# Altium PCB RPCB6996130008R01.PcbDoc
Units mil, origin at the board's own origin, x right, y up, seen from the top; angles counter-clockwise.
Board outline 2975 x 2998.52 mil, 2 copper layers (Top Layer, Top, Bottom Layer, Bottom); 65 components, 50 nets, 211 pads, 86 vias.
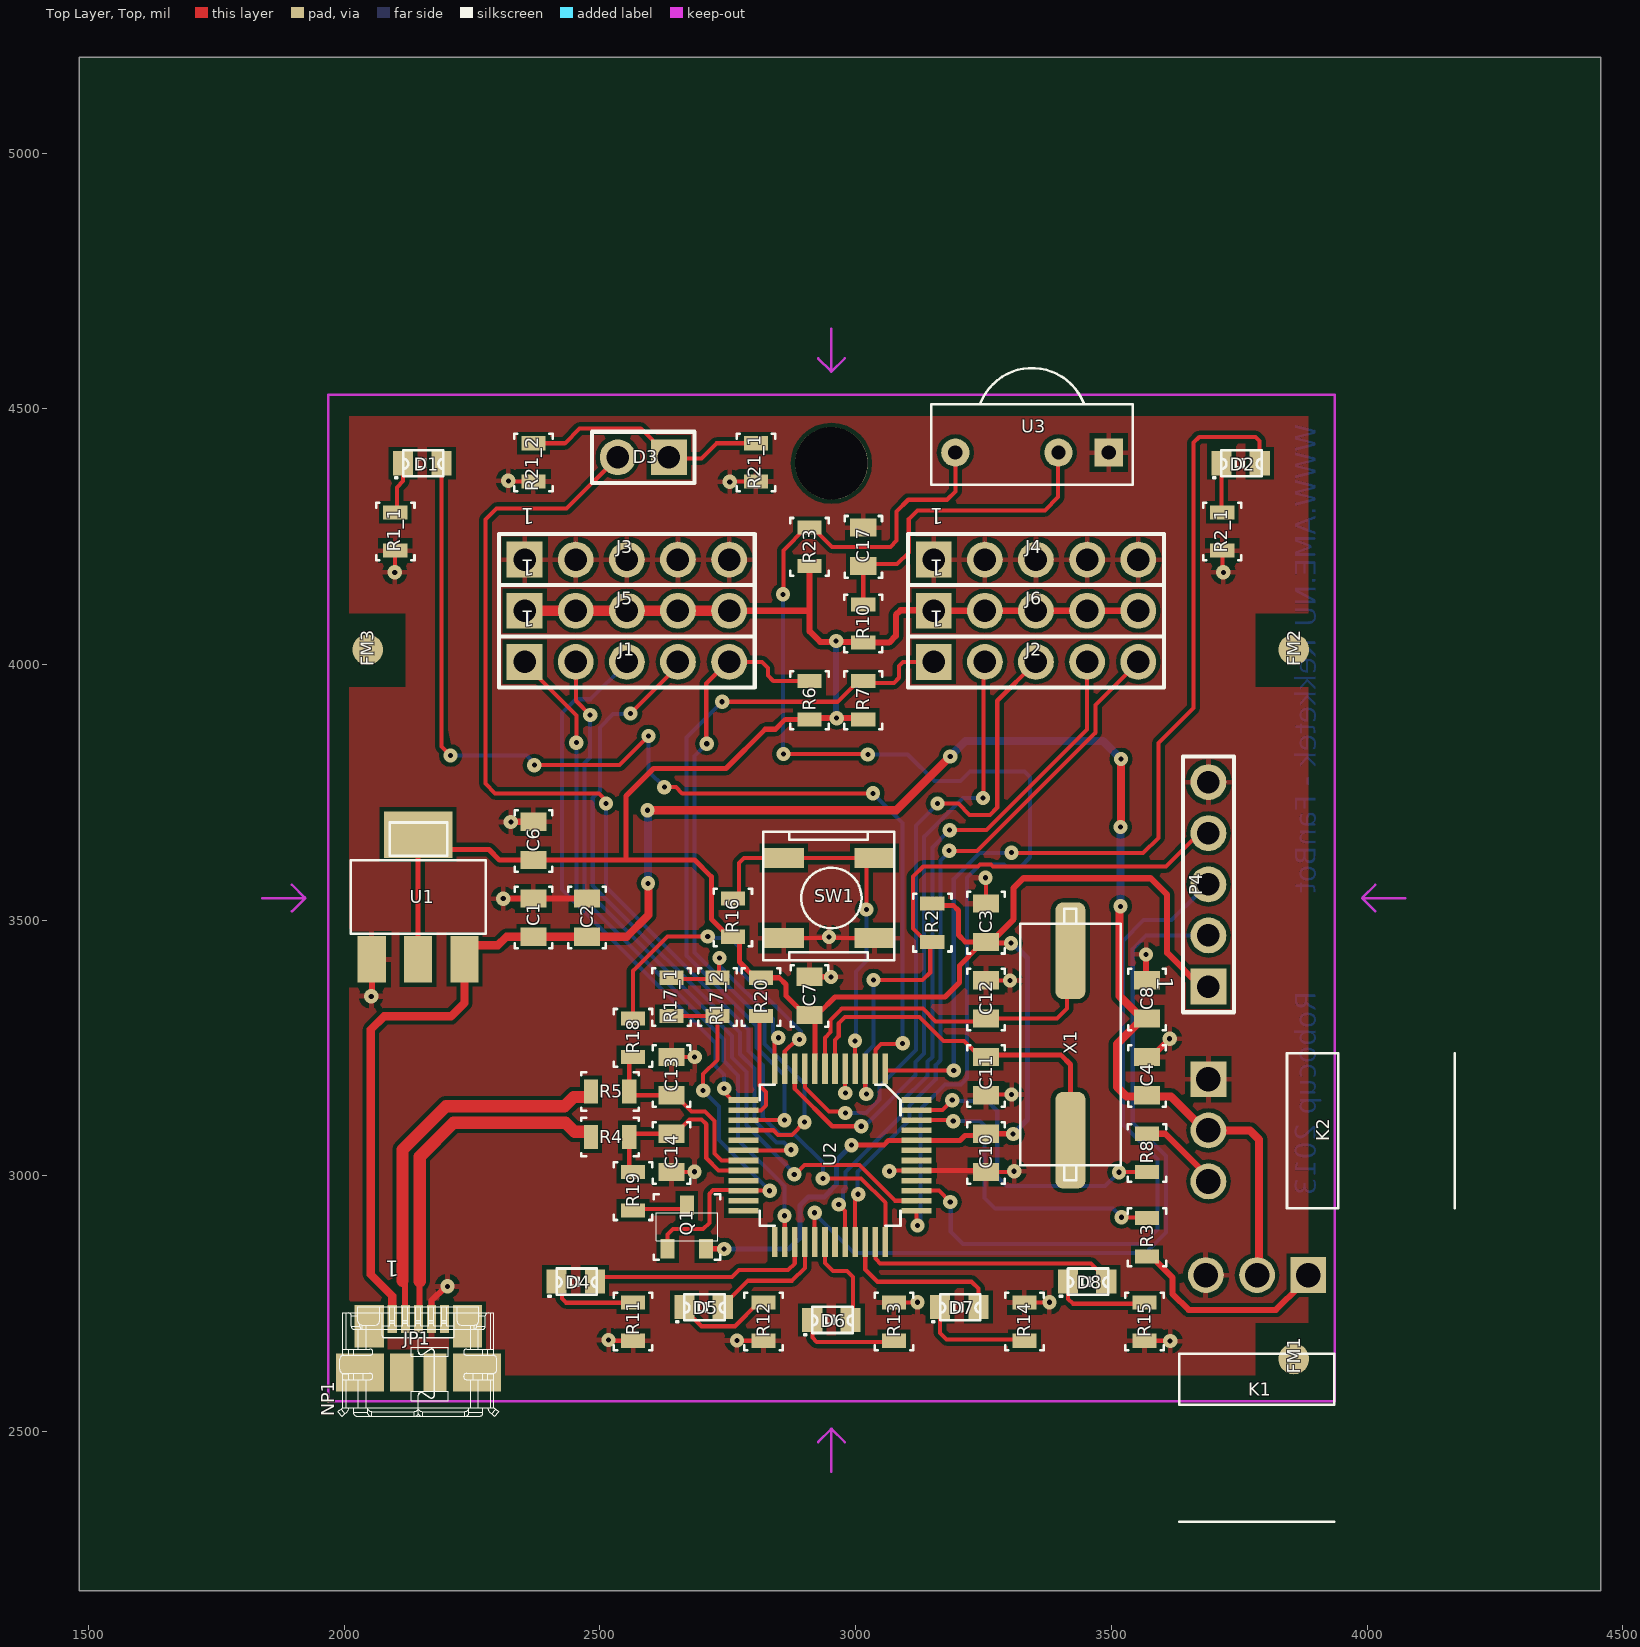
[diagram p0: Top Layer, Top view]
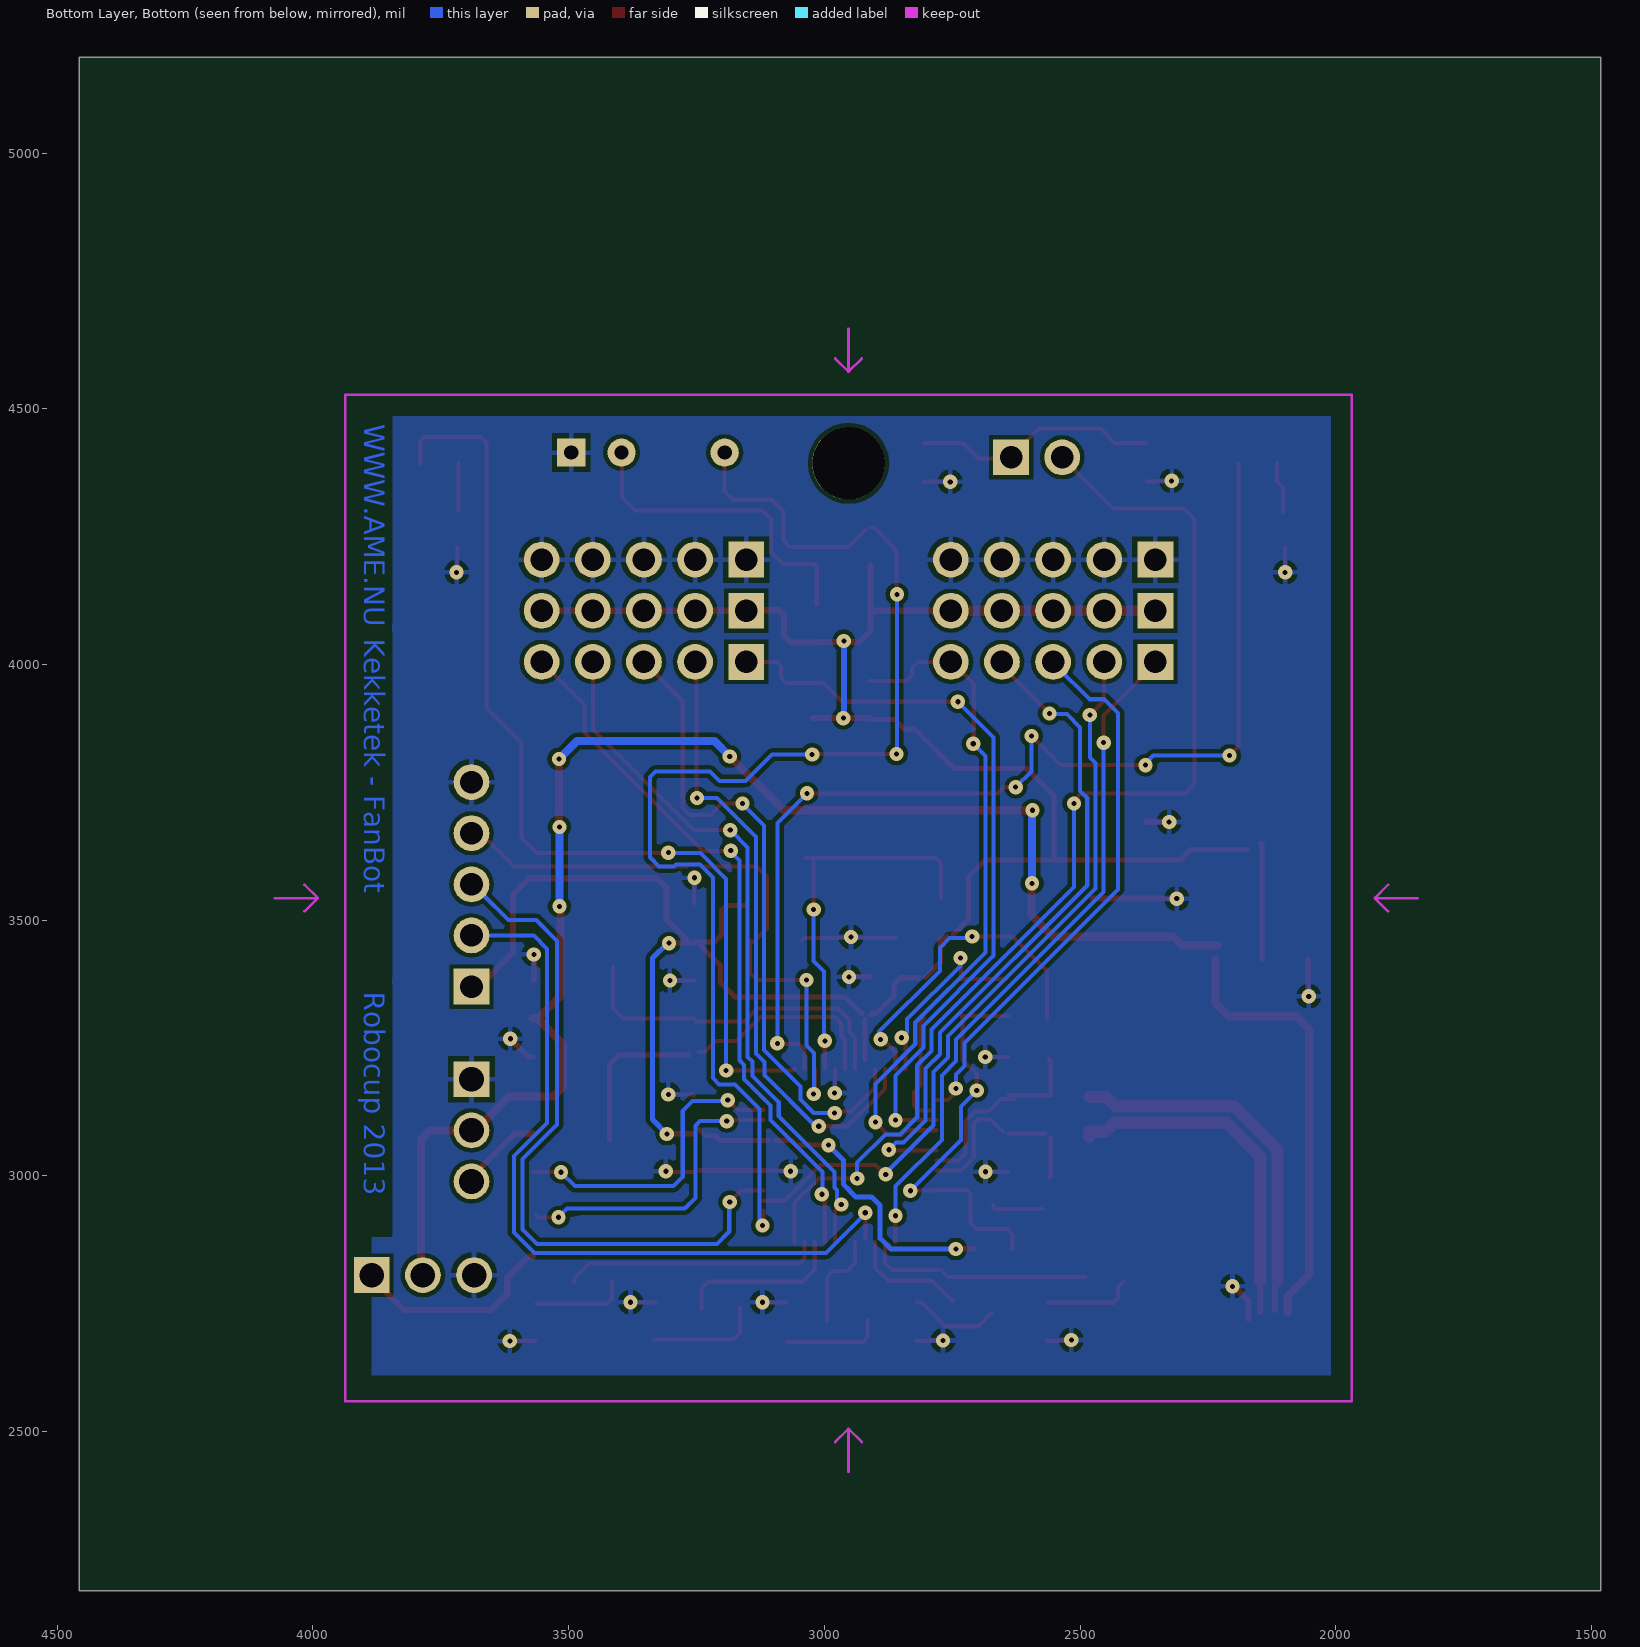
[diagram p1: Bottom Layer, Bottom view, seen from below]
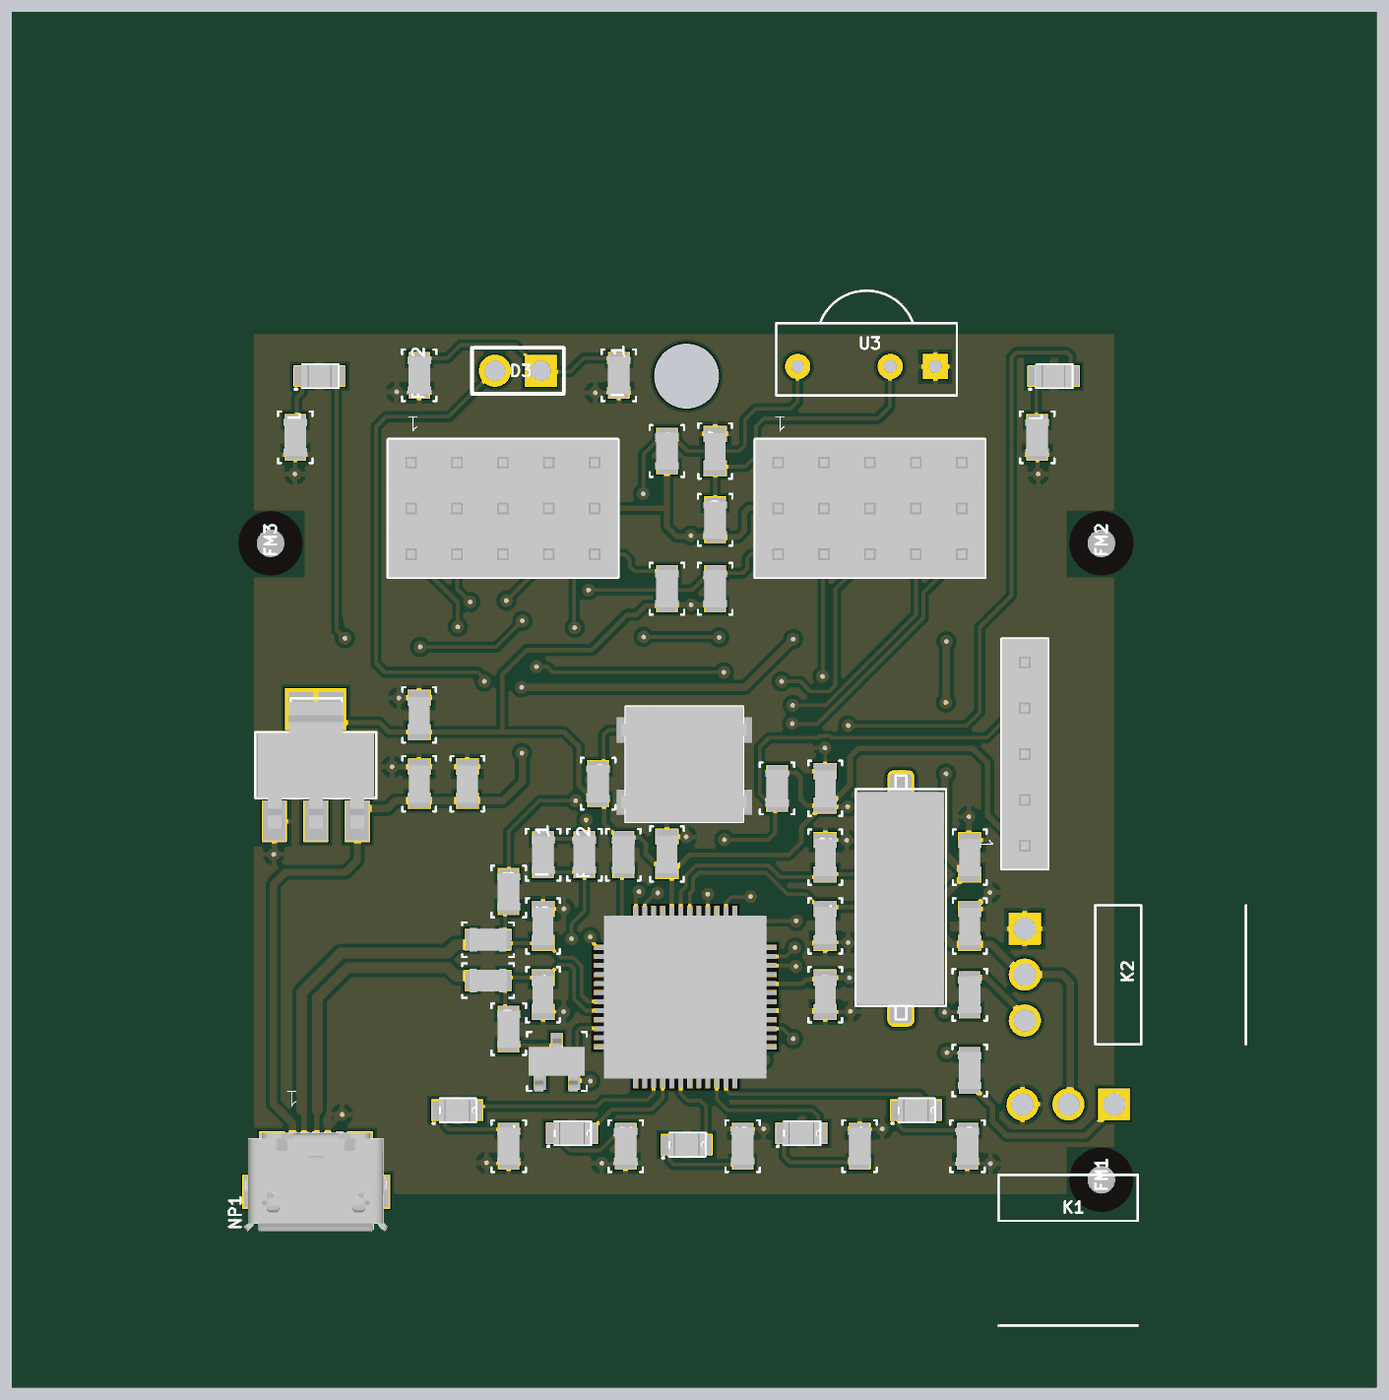
[diagram p2: 3D render of the assembled board from above, using the file's embedded part models]

## Layer stack, top to bottom
Top Layer, Top: signal copper 1.4
Dielectric: core 12.6, FR-4, Dk 4.8
Bottom Layer, Bottom: signal copper 1.4

## Board outline
1482,2188.75 4457,2188.75 4457,5187.27 1482,5187.27

## Design rules (kind name [scope] priority, off if disabled: settings)
AssemblyTestPointUsage [All] p1 off:
AssemblyTestpoint [All] p1 off: testpointundercomponent=TRUE minsize=40 maxsize=100 preferedsize=60 minholesize=0 maxholesize=40 preferedholesize=32 testpointgrid=1 usegrid=TRUE gridtolerance=0.01 allowsidetop=TRUE allowsidebottom=TRUE
Clearance Clearance_2 [InDifferentialPair('USB') vs INNet('GND')] p1: gap=8
Clearance Clearance_1 [ispad vs ispad] p2: gap=7.6
Clearance Clearance_Design_HoleToHole [(IsVia Or IsThruPin) vs (IsVia Or IsThruPin)] p3: gap=11
Clearance [All] p4: gap=8
ComponentClearance [All] p1 off: gap=10 collisioncheckmode=3 verticalgap=10 showdistances=FALSE
DiffPairsRouting [All] p1: maxlimit=8 minlimit=8 mostfreqgap=8 maxuncoupledlength=500
FabricationTestPointUsage [All] p1 off: valid=0 allowmultiple=FALSE
FabricationTestpoint [All] p1 off: side=3 testpointundercomponent=TRUE minsize=40 maxsize=100 preferedsize=60 minholesize=0 maxholesize=40 preferedholesize=32 testpointgrid=1 allowsidetop=TRUE allowsidebottom=TRUE usegrid=TRUE gridtolerance=0.01
HoleSize [All] p1: absolutevalues=TRUE maxlimit=142 minlimit=10 maxpercent=80.000 minpercent=20.000
MinimumSolderMaskSliver [All] p1 off: minsoldermaskwidth=10
PlaneClearance [All] p1: clearance=9.8
PolygonConnect [All] p1: connectstyle=Relief reliefconductorwidth=10 reliefentries=4 polygonreliefangle="90 Angle" airgapwidth=10
RoutingVias [All] p1: holewidth=10 width=28 viastyle="Through Hole" minholewidth=10 minwidth=28 maxholewidth=28 maxwidth=50
SilkToSilkClearance [All] p1 off: silktosilkclearance=10
SilkToSolderMaskClearance [IsPad] p1 off: minsilkscreentomaskgap=10 clearancetoexposedcopper=TRUE
SolderMaskExpansion [All] p1: expansion=3
Width [All] p1: maxlimit=50 minlimit=8 preferedwidth=8
17 further rules are at their usual default settings.

## Classes and differential pairs
differential pair usb: +USB_DM -USB_DP

## Components (designator, comment, footprint, x,y, rotation, side; value= is the part's Value field where it differs from the comment)
C1 "10U 0805 X5R16V" C0805 2370,3505 r90 top
C2 "100N 0805 X7R50V" C0805 2475,3505 r90 top
C3 "100N 0805 X7R50V" C0805 3255,3495 r90 top
C4 "100N 0805 X7R50V" C0805 3570,3195 r90 top
C6 "10U 0805 X5R16V" C0805 2370,3655 r90 top
C7 "100N 0805 X7R50V" C0805 2910,3352 r90 top
C8 "10U 0805 X5R16V" C0805 3570,3345 r90 top
C10 "100N 0805 X7R50V" C0805 3255,3045 r270 top
C11 "33P 0805 X7R50V" C0805 3255,3195 r270 top
C12 "33P 0805 X7R50V" C0805 3255,3345 r90 top
C13 "18P 0805 X7R50V" C0805 2640,3195 r90 top
C14 "18P 0805 X7R50V" C0805 2640,3045 r270 top
C17 "10U 0805 X5R16V" C0805 3015,4230 r90 top
D1 "KP-2012SYC" "0805 LED" 2152.76,4393.31 r0 top locked
D2 "KP-2012SYC" "0805 LED" 3752.76,4393.31 r0 top
D3 "HEADM2X1" HEADM2X1 2635,4405 r0 top
D4 "LS R976" "0805 LED OSR" 2452.76,2793.31 r0 top locked
D5 "LG R971" "0805 LED OSR" 2702.76,2743.31 r0 top locked
D6 "LS R976" "0805 LED OSR" 2952.76,2718.31 r0 top locked
D7 "LG R971" "0805 LED OSR" 3202.76,2743.31 r0 top locked
D8 "LS R976" "0805 LED OSR" 3452.76,2793.31 r0 top locked
FM1 "FIDUCIAL MARK 1" "FIDUCIAL MARK 1" 3857,2642 r90 top
FM2 "FIDUCIAL MARK 1" "FIDUCIAL MARK 1" 3857,4029 r90 top
FM3 "FIDUCIAL MARK 1" "FIDUCIAL MARK 1" 2046,4029 r90 top
J1 "HEADM5X1" M20-9770522 2352.76,4005 r180 top
J2 "HEADM5X1" M20-9770522 3152.76,4005 r180 top
J3 "HEADM5X1" M20-9770522 2352.76,4205 r180 top
J4 "HEADM5X1" M20-9770522 3152.76,4205 r180 top
J5 "HEADM5X1" M20-9770522 2352.76,4105 r180 top
J6 "HEADM5X1" M20-9770522 3152.76,4105 r180 top
JP1 "47346-1001" 47346-0001 2145,2530 r0 top
K1 "M20-9750346" M20-9750346 3885,2806 r0 top
K2 "M20-9750346" M20-9750346 3690,3189 r90 top
NP1 "NULPUNT" NULPUNT 1968.5,2559.06 r90 top
P4 "HEADM5X1" M20-9770522 3690,3370 r270 top
Q1 "NTR1P02LT1" SOT-23 2670,2900 r270 top
R1_1 "100E 0805 1%" R0805 2100,4260 r270 top
R2 "47K0 0805 1%" R0805 3150,3495 r90 top
R2_1 "100E 0805 1%" R0805 3717,4260 r270 top
R3 "33E0 0805 1%" R0805 3570,2880 r90 top
R4 "33E0 0805 1%" R0805 2520,3076 r180 top
R5 "33E0 0805 1%" R0805 2520,3165 r180 top
R6 "4K70 0805 1%" R0805 2910,3930 r90 top
R7 "4K70 0805 1%" R0805 3015,3930 r90 top
R8 "33E0 0805 1%" R0805 3570,3045 r270 top
R10 "33E0 0805 1%" R0805 3015,4080 r90 top
R11 "100E 0805 1%" R0805 2565,2715 r270 top
R12 "68E0 0805 1%" R0805 2820,2715 r270 top
R13 "100E 0805 1%" R0805 3075,2715 r90 top
R14 "68E0 0805 1%" R0805 3330,2715 r90 top
R15 "100E 0805 1%" R0805 3565,2715 r270 top
R16 "47K0 0805 1%" R0805 2760,3505 r270 top
R17_1 "470E 0805 1%" R0805 2640,3350 r90 top
R17_2 "470E 0805 1%" R0805 2730,3350 r90 top
R18 "47K0 0805 1%" R0805 2565,3270 r90 top
R19 "1K50 0805 1%" R0805 2565,2970 r90 top
R20 "47K0 0805 1%" R0805 2815,3350 r90 top
R21_1 "470E 0805 1%" R0805 2805,4395 r270 top
R21_2 "470E 0805 1%" R0805 2370,4395 r270 top
R23 "47K0 0805 1%" R0805 2910,4230 r90 top
SW1 "ELTS-1234N-250" ELTS-1234N 2952.76,3543.31 r0 top locked
U1 "NX1117C33Z" SOT-223 2145,3545 r0 top
U2 "LPC11U24FBD48_301" LQFP48 2950,3040 r270 top locked
U3 "TSOP31238" TSOP312 3345,4430 r180 top
X1 "HC49US 12.0000" HC49/4HSMX 3420,3255 r90 top

## Footprints (in the part's own frame and the unit in brackets; to place one, negate y for a bottom-side part, rotate by r counter-clockwise, add the part's x,y. Pads: shape width x height; smd on the part's side, far side on the other; paste and mask are expansions set on the pad)
"0805 LED" [mm]
  rect 1x1.2 smd paste-25.4: 1(-0.95,0) 2(0.95,0)
  silkscreen extent -1.35,-0.75 1.05,0.65, body extent -1,-0.62 1,0.63, height 1.1
"0805 LED OSR" [mm]
  rect 1x1.2 smd paste-25.4: 1(-0.95,0) 2(0.95,0)
  silkscreen extent -1.35,-0.75 1.05,0.65, body extent -1,-0.62 1,0.63, height 0.9
47346-0001 [mm]
  rect 0.45x1.38 smd paste-25.4: 1(-1.295,4.828) 2(-0.646,4.828) 5(1.305,4.828)
  rect 0.445x1.38 smd paste-25.4: 3(0.005,4.828) 4(0.654,4.828)
  rect 1.45x2.1 smd paste-25.4: 6(-2.44,4.468) 7(2.45,4.468)
  rect 2.38x1.9 smd paste-25.4: 8(-2.9,2.168) 9(2.92,2.168)
  rect 1.15x1.9 smd paste-25.4: 9(-0.82,2.168) 10(0.83,2.168)
  silkscreen extent -3.99,0 3.99,5.43, body extent -3.99,0 3.99,5.43, height 2.73
C0805 [mm]
  rect 0.9x1.3 smd paste-25.4: 1(-0.95,0) 2(0.95,0)
  silkscreen extent -1.53,-0.93 1.53,0.93, body extent -1.05,-0.63 1,0.62, height 0.8
ELTS-1234N [mm]
  rect 2x1 smd paste-25.4: 1(-2.369,1.994) 2(-2.369,-1.994) 3(2.14,1.994) 4(2.14,-1.994)
  silkscreen extent -3.38,-3.1 3.12,3.3, body extent -3.6,-3.1 3.32,3.3, height 3.4
"FIDUCIAL MARK 1" [mil]
  round 60 smd paste-1000 mask-1000: 1(0,0)
HC49/4HSMX [mm]
  rrect50% 4.8x1.5 smd paste-25.4: 1(-4.7,0) 2(4.7,0)
  silkscreen extent -6.7,-2.5 6.8,2.5, body extent -5.85,-2.4 5.9,2.4, height 4.4
HEADM2X1 [mil]
  rect 70x70 hole 44: 1(0,0)
  round 70 hole 44: 2(-100,0)
  silkscreen extent -150,-50 50,50
LQFP48 [mm]
  rect 1.5x0.28 smd paste-25.4 mask-25.4: 1(-4.3,2.75) 2(-4.3,2.25) 3(-4.3,1.75) 4(-4.3,1.25) 5(-4.3,0.75) 6(-4.3,0.25) 7(-4.3,-0.25) 8(-4.3,-0.75) 9(-4.3,-1.25) 10(-4.3,-1.75) 11(-4.3,-2.25) 12(-4.3,-2.75) 25(4.3,-2.75) 26(4.3,-2.25) 27(4.3,-1.75) 28(4.3,-1.25) 29(4.3,-0.75) 30(4.3,-0.25) 31(4.3,0.25) 32(4.3,0.75) 33(4.3,1.25) 34(4.3,1.75) 35(4.3,2.25) 36(4.3,2.75)
  rect 0.28x1.5 smd paste-25.4 mask-25.4: 13(-2.75,-4.3) 14(-2.25,-4.3) 15(-1.75,-4.3) 16(-1.25,-4.3) 17(-0.75,-4.3) 18(-0.25,-4.3) 19(0.25,-4.3) 20(0.75,-4.3) 21(1.25,-4.3) 22(1.75,-4.3) 23(2.25,-4.3) 24(2.75,-4.3) 37(2.75,4.3) 38(2.25,4.3) 39(1.75,4.3) 40(1.25,4.3) 41(0.75,4.3) 42(0.25,4.3) 43(-0.25,4.3) 44(-0.75,4.3) 45(-1.25,4.3) 46(-1.75,4.3) 47(-2.25,4.3) 48(-2.75,4.3)
  silkscreen extent -3.5,-3.5 3.5,3.5, body extent -4.5,-4.5 4.5,4.5, height 1.6
M20-9750346 [mil]
  rect 70x70 hole 48: 1(0,0)
  round 70 hole 48: 2(-100,0) 3(-200,0)
  silkscreen extent -252,-482 51,-154
M20-9770522 [mil]
  rect 70x70 hole 44: 1(0,0)
  round 70 hole 44: 2(-100,0) 3(-200,0) 4(-300,0) 5(-400,0)
  silkscreen extent -450,-50 50,50, body extent -450,-50 50,50, height 328
NULPUNT [mil]
  round 5 smd paste-1000 mask-1000: 1(0,0)
R0805 [mm]
  rect 0.7x1.2 smd paste-25.4: 1(-0.95,0) 2(0.95,0)
  silkscreen extent -1.43,-0.95 1.43,0.95, body extent -1.03,-0.65 1.03,0.65, height 0.55
SOT-23 [mm]
  rect 0.979x0.689 smd paste-25.4: 1(1.08,-0.95) 2(1.08,0.95) 3(-1.08,0)
  silkscreen extent -1.63,-1.65 1.63,1.65, body extent -1.55,-1.55 1.68,1.55, height 1.1
SOT-223 [mil]
  rect 55.12x91 smd paste-1000: 1(-90.91,-121.73) 2(-0.35,-121.73) 3(90.2,-121.73)
  rect 134x91 smd paste-1000: 4(-0.35,122.36)
  silkscreen extent -132,-71 132,146, body extent -128,-138 126,138, height 63
TSOP312 [mm]
  rect 1.4x1.4 hole 0.71: 1(-3.81,0.4)
  round 1.4 hole 0.71: 2(-1.31,0.4) 3(3.81,0.4)
  silkscreen extent -5,-3.8 5,2

## Free pads (board coordinates)
  round 141.73 hole 141.73 unplated: 0(2952.76,4393.31)

## Via types
v1: diameter 28, hole 10, Top Layer, Top to Bottom Layer, Bottom, tented both sides, 86 vias

## Nets (pads, with @x,y where several pads share a name; then routed paths per layer and width w, separated by ;. In a path a pad name is that pad's centre, name@x,y a point inside that pad or via, vN(x,y) a via of type N, cw(c..) or ccw(c..) an arc to the next point about the centre after c; other vN are vias at no path point)
+3.3V: C3.1 C6.1 C7.1 C10.1 J5.1 J5.2 J5.3 J5.4 J5.5 J6.1 J6.2 J6.3 J6.4 J6.5 P4.1 Q1.2 R2.2 R6.1 R7.1 R10.1 R16.2 R20.2 R23.1 U1.2 U1.4 U2.8 U2.44 | length 5820.2
  Top Layer, Top w8: R23.1 R23.1@2910,4195
  Top Layer, Top w10: U1.2 2144.65,3648.65 U1.4@2147,3651 ; U1.4@2172,3638 2283,3638 2303.4,3617.6 C6.1 2551,3617.6 ; Q1.2 2742.52,2857.48 v1(2743,2857) ; R16.2@2748,3472 2718,3502 2718,3585 2685.4,3617.6 2551,3617.6 ; R16.2 2762.6,3465 2771,3465 2773,3463 2773,3418 R20.2@2803,3388 ; R20.2 2850.6,3387.4 2864,3374 2864,3352 2898,3318 2906.6,3318 C7.1 ; R6.1@2910,3893 R6.1 2862.6,3892.6 2843.24,3873.24 2823.24,3873.24 2746.7,3796.7 2604.7,3796.7 2551,3743 2551,3617.6 ; U2.8@2920.47,3227.29 C7.1@2920.47,3305.47 ; C7.1@2927,3318 2928,3318 2960,3350 3175,3350 3203,3378 3203,3411 C3.1@3242,3450 ; v1(2992,3060) 3055,3060 3064,3069 U2.44@3096,3069 ; U2.44@3109.29,3069 3204,3069 3214,3079 3233,3079 C10.1@3245,3091 ; R2.2@3153,3529 3191,3529 3201,3519 3201,3471 3214.4,3457.6 C3.1 3257.6,3455 v1(3304,3455) ; C10.1 3307.6,3082.4 v1(3308,3082)
  Top Layer, Top w12: J5.5 2910,4105 ; R23.1 2910,4105 ; R6.1@2911,3895 v1(2963,3895) R7.1@3023,3895 ; v1(2962,4046) v1@2962,4044 ; R10.1 3065.6,4042.6 3079,4056 3079,4097 3088,4106 J6.1@3155,4106 ; R10.1@3018,4044 v1@2962,4044 ; J6.1 J6.2 J6.3 J6.4 J6.5@3549,4105 ; C3.1@3270,3463 3309,3502 3309,3563 3328,3582 3577,3582 3609,3550 3609,3436 P4.1@3675,3370 ; 2910,4105 2910,4065 2931,4044 v1@2962,4044
  Top Layer, Top w20: J5.1 J5.2 J5.3 J5.4 J5.5@2748,4105
  Bottom Layer, Bottom w10: v1(2743,2857) 2870,2857 2891,2878 2891,2942 2908,2959 2939,2959 2951,2971 2951,2971.82 2963,2983.82 2963,3031 v1(2992,3060) ; v1@3306,3456 3336,3426 3336,3110 v1(3308,3082)
  Bottom Layer, Bottom w12: v1(2962,4046) 2962,3896 v1(2963,3895)
+5V: C1.1 C2.1 C4.1 C8.1 JP1.1 K1.2 K2.2 U1.3 | length 3721.5
  Top Layer, Top w16: JP1.1@2094,2733 2094,2765 2052,2807 2052,3286 2078,3312 2209,3312 2235.2,3338.2 U1.3 ; U1.3@2232,3451 2301,3451 2317.6,3467.6 C1.1 C2.1 2552.6,3467.6 2595,3510 2595,3571 v1(2594,3572) ; v1(2593,3715) 3080,3715 v1(3185,3820) ; v1(3518,3527) 3516,3529 3516,3352 3560.4,3307.6 C8.1@3560.6,3307.6 ; v1(3518,3682) 3519,3683 v1(3519,3815) ; C8.1@3571.6,3307.6 C8.1 C8.1@3560.6,3307.6 ; K2.2@3677,3095 3617,3155 3530,3155 3511,3174 3511,3258 C8.1@3560.6,3307.6 ; K2.2 3771,3089 3789,3071 K1.2@3789,2801
  Bottom Layer, Bottom w16: v1(2593,3715) 2594,3714 v1(2594,3572) ; v1(3185,3820) 3215,3850 3484,3850 v1(3519,3815) ; v1(3518,3527) v1(3518,3682)
AIN_0: J2.4 U2.32 | length 1382.6
  Top Layer, Top w8: v1(2967,2944) 2979.53,2931.47 U2.32 ; v1(3184,3676) 3255.63,3676 3452.76,3873.13 J2.4
  Bottom Layer, Bottom w8: v1(2967,2944) 2975.58,2952.58 2975.58,2972.35 2980,2976.77 2980,3007.68 3089.3,3116.98 3089.3,3144.13 3140.8,3195.63 3140.8,3223.47 3150,3232.67 3150,3642 v1(3184,3676)
AIN_1: J2.5 U2.33 | length 1404.1
  Top Layer, Top w8: U2.33 2999.21,2958.21 v1(3005,2964) ; v1(3183,3636) 3184,3635 3237.25,3635 3468.76,3866.5 3468.76,3921 J2.5
  Bottom Layer, Bottom w8: v1@3000,2969 v1(3005,2964) ; v1@3004,2965 3004,3008 3105.3,3109.3 3105.3,3137.5 3156.8,3189 3156.8,3216.84 3166,3226.05 3166,3617 3184,3635 v1(3183,3636)
GND: C1.2 C2.2 C3.2 C4.2 C6.2 C7.2 C8.2 C10.2 C11.2 C12.2 C13.2 C14.2 C17.2 J3.1 J3.2 J3.3 J3.4 J3.5 J4.1 J4.2 J4.3 J4.4 J4.5 JP1.4 K1.3 K2.1 P4.5 R1_1.2 R2_1.2 R11.2 R12.2 R13.2 R14.2 R15.2 R21_1.2 R21_2.2 SW1.2 SW1.4 U1.1 U2.5 U2.41 U3.1 | length 1662.5
  Top Layer, Top w8: v1(2099,4180) 2099.4,4180.4 R1_1.2@2099.4,4229 ; v1(2321,4359) 2319.6,4357.6 R21_2.2 ; v1(2517,2679) 2518.4,2677.6 R11.2 ; C14.2 2684.6,3007.6 v1(2685,3008) ; C13.2 v1(2685.4,3232.4) ; v1(2754,4357) 2754.6,4357.6 R21_1.2 ; v1(2768,2678) 2768.4,2677.6 R12.2 ; SW1.2 v1@2948,3464.81 ; v1(2948,3467) v1@2948,3464.81 ; U2.5 2979.53,3162.47 v1(2980,3162) ; SW1.4@3044,3460 3039.19,3464.81 SW1.4 v1@2948,3464.81 ; v1(3066,3009) 3067.47,3010.47 U2.41 ; R13.2 3120.4,2752.4 v1(3121,2753) ; C10.2@3242.47,3010.47 C10.2@3243,3011 ; v1(3254,3583) 3255,3582 C3.2 ; C10.2 3308.6,3007.6 v1(3310,3009) ; C11.2 3256.4,3159 v1(3305,3159) ; C12.2 3301.6,3382.4 v1(3302,3382) ; R14.2 3378.4,2752.4 v1(3379,2753) ; R15.2 3614.4,2677.6 v1(3615,2677) ; C8.2@3568,3384.4 C8.2 ; v1@3717.6,4181.6 R2_1.2@3717.6,4229
  Top Layer, Top w10: C7.2 2951.6,3389.4 v1(2952,3389) ; U2.41 C10.2@3242.47,3010.47 ; C4.2 C4.2@3578.4,3232.4
  Top Layer, Top w12: v1(2053,3351) 2054.09,3352.09 U1.1 ; JP1.4 2170.77,2755.77 v1@2197.5,2782.5 ; v1(2311,3542) 2311.4,3542.4 C1.2 C2.2 ; v1(2326,3692) 2326.4,3692.4 C6.2 ; C8.2@3568,3384.4 v1(3568,3433) ; C4.2@3578.4,3232.4 v1(3614,3268)
  other v1: 2202,2784 3719.2,4180
IO_0: J2.2 U2.10 | length 1234.9
  Top Layer, Top w8: U2.10 2881.1,3170.27 2954.37,3097 v1(3011,3097) ; v1(3249,3739) 3250,3740 J2.2@3250,4007
  Bottom Layer, Bottom w8: v1(3011,3097) 3017.4,3097 3117.2,3196.8 3117.2,3222.5 3134,3239.3 3134,3663 3210,3739 v1(3249,3739)
IO_1: J2.3 U2.9 | length 1288.3
  Top Layer, Top w8: U2.9 2900.79,3173.21 2948,3126 2977,3126 v1(2980,3123) ; v1(3160,3728) 3201,3728 3223,3706 3263,3706 3277,3720 3277,3929 3352.76,4004.76 J2.3
  Bottom Layer, Bottom w8: v1(2980,3123) 3020.77,3123 3047,3149.23 3047,3174.93 3118,3245.93 3118,3685.2 v1@3160.9,3728.1
IR_DATA: R23.2 U2.37 U3.3 | length 2496.3
  Top Layer, Top w8: v1(2858,4137) 2859,4138 2859,4223 2903.4,4267.4 R23.2 ; v1(2859,3825) v1@3024,3825 ; R23.2@2919,4263 2921,4263 2954,4230 3068,4230 3080,4242 3080,4299 3103,4322 3179,4322 3195,4338 U3.3 ; U2.37 3119.29,2904.71 v1(3121,2903)
  Bottom Layer, Bottom w8: v1(2858,4137) 2858,3826 v1(2859,3825) ; v1(3024,3824) 3102,3824 3154,3772 3205,3772 3224,3791 3330,3791 3341,3780 3341,3623 3323.3,3605.3 3316.07,3605.3 3315.77,3605 3294.23,3605 3290.23,3609 3243.23,3609 3218,3583.77 3218,3191 3206,3179 3175,3179 3127,3131 3127,2909 v1(3121,2903)
IR_LED: D3.2 U2.36 | length 2225.3
  Top Layer, Top w8: v1(2512,3728) 2512,3734 2498,3748 2295,3748 2276,3767 2276,4283 2298,4305 2435,4305 D3.2 ; v1(2936,2995) 3010.77,2995 3058.27,2947.5 U2.36
  Bottom Layer, Bottom w8: v1(2512,3728) 2512,3564.82 2790.3,3286.52 2790.3,3244.45 2818.4,3216.35 2818.4,3114.83 2852.23,3081 2880.77,3081 2936,3025.77 v1(2936,2995)
IR_LED_RES: D3.1 R21_1.1 R21_2.1 | length 480.3
  Top Layer, Top w8: R21_2.1 2431.4,4432.4 2460,4461 2580,4461 2629,4412 D3.1@2634,4412 ; D3.1@2633,4403 2699,4403 2728.4,4432.4 R21_1.1
IR_PWR: C17.1 R10.2 U3.2 | length 638.8
  Top Layer, Top w8: R10.2 C17.1 3015,4194 3017,4196 3081,4196 3104,4219 3104,4284 3121,4301 3370,4301 3396,4327 U3.2@3396,4415
ISP: R16.1 SW1.1 SW1.3 U2.4 | length 758.8
  Top Layer, Top w8: R16.1@2772,3543 2772,3612 2781.81,3621.81 SW1.1 SW1.3 ; v1(2999,3264) 2999.21,3264.21 U2.4 ; v1(3021,3521) 3021,3619 SW1.3@3022,3620
  Bottom Layer, Bottom w8: v1(2999,3264) 3001,3266 3001,3400 3021,3420 v1(3021,3521)
LED_1: D1.2 U2.2 | length 2134.2
  Top Layer, Top w8: D1.2 2190.16,3839.84 v1(2208,3822) ; v1(2372,3803) 2538,3803 v1(2595,3860) ; v1(2626,3760) 2649,3760 2661,3748 v1(3034,3748) ; U2.2 3038.58,3246.58 3050,3258 3091,3258 v1(3092,3259)
  Bottom Layer, Bottom w8: v1(2208,3822) 2357,3822 2372,3807 v1(2372,3803) ; v1(2595,3860) 2595,3791 v1(2626,3760) ; v1(3034,3748) 3092,3690 v1(3092,3259)
LED_1_RES: D1.1 R1_1.1 | length 101
  Top Layer, Top w8: R1_1.1@2103,4297.4 2103,4346 2115.35,4358.35 D1.1
LED_2: D2.2 U2.1 | length 1926.5
  Top Layer, Top w8: U2.1 3061.56,3206 v1(3192,3206) ; v1(3305,3632) 3305,3631 3562,3631 3592,3661 3592,3846 3661,3915 3661,4434 3672,4445 3782,4445 3790.16,4436.84 D2.2
  Bottom Layer, Bottom w8: v1(3192,3206) 3192,3580.4 3242.6,3631 3304,3631 v1(3305,3632)
LED_2_RES: D2.1 R2_1.1 | length 92
  Top Layer, Top w8: R2_1.1@3715.35,4301.35 D2.1
LED_4: D4.2 U2.27 | length 443.9
  Top Layer, Top w8: D4.2@2490,2802 2758,2802 2772,2816 2868,2816 2881.1,2829.1 U2.27
LED_4_RES: D4.1 R11.1 | length 179
  Top Layer, Top w8: D4.1 2426,2782.67 2426,2760 2434,2752 R11.1@2564,2752
LED_5: D5.2 U2.28 | length 228.5
  Top Layer, Top w8: D5.2@2750,2755 2790,2795 2876,2795 2900.79,2819.79 U2.28
LED_5_RES: D5.1 R12.1 | length 178.4
  Top Layer, Top w8: D5.1@2672,2733 2699,2706 2764,2706 2810.4,2752.4 R12.1
LED_6: D6.2 U2.30 | length 193.2
  Top Layer, Top w8: U2.30 2940.16,2829.84 2956,2814 2983,2814 2995,2802 D6.2@2995,2716
LED_6_RES: D6.1 R13.1 | length 196.9
  Top Layer, Top w8: D6.1 2915.36,2683.64 2924,2675 R13.1@3074,2675
LED_7: D7.2 U2.34 | length 330.1
  Top Layer, Top w8: U2.34 3018.9,2817.1 3043,2793 3227,2793 3240,2780 D7.2@3240,2740
LED_7_RES: D7.1 R14.1 | length 223.5
  Top Layer, Top w8: D7.1 3165.36,2692.64 3178,2680 R14.1@3333,2680
LED_8: D8.2 U2.35 | length 506.6
  Top Layer, Top w8: U2.35 3038.58,2838.81 3040.76,2836.63 3040.76,2836.21 3048.03,2828.93 3460.07,2828.93 3489,2800 D8.2@3489,2792
LED_8_RES: D8.1 R15.1 | length 185.3
  Top Layer, Top w8: D8.1 3415.36,2759.64 3425,2750 R15.1@3563,2750
MISO: J1.1 U2.26 | length 1329.3
  Top Layer, Top w8: J1.1@2369,3996 2369,3985 2454,3900 v1(2454,3847) ; v1(2861,2922) 2861.42,2921.58 U2.26
  Bottom Layer, Bottom w8: v1(2454,3847) 2454,3554.94 2742.3,3266.64 2742.3,3224.56 2770.4,3196.46 2770.4,3070.4 2861,2979.8 v1(2861,2922)
MOSI: J1.2 U2.38 | length 1459.6
  Top Layer, Top w8: J1.2@2453,4001 2453,3929 v1(2481,3901) ; v1(2880,3003) 2882,3003 2900,3021 3007.4,3021 3076.98,2951.42 U2.38
  Bottom Layer, Bottom w8: v1(2481,3901) 2481,3818 2470,3807 2470,3561.57 2758.3,3273.27 2758.3,3231.19 2786.4,3203.09 2786.4,3099 2880,3005.4 v1(2880,3003)
RESET: P4.4 R2.1 U2.3 | length 1196.2
  Top Layer, Top w8: v1@3018.9,3159.1 U2.3 ; v1(3035,3383) 3131,3383 3146,3398 R2.1@3146,3460 ; R2.1 3138.4,3457.6 3112,3484 3112,3585 3132.3,3605.3 3239.53,3605.3 3243.23,3609 3264.77,3609 3268.47,3605.3 3607.3,3605.3 P4.4@3666,3664
  Bottom Layer, Bottom w8: v1@3022,3163 3020,3165 3020,3240 3035,3255 v1(3035,3383)
  other v1: 3021,3160
RXD: R18.2 U2.11 | length 640.2
  Top Layer, Top w8: R18.2 2565,3401 2632,3468 v1(2711,3468) ; U2.11 2861.42,3243.42 2885,3267 v1(2890,3267)
  Bottom Layer, Bottom w8: v1(2711,3468) 2714,3465 2755,3465 2774,3446 2774,3401 2893,3282 v1@2893,3267
SCK: J1.3 U2.13 | length 1075.6
  Top Layer, Top w8: v1(2743,3171) 2743,3164 2758.73,3148.27 U2.13
  Bottom Layer, Bottom w8: J1.3@2547,3997 2482,3932 2453,3932 2426,3905 2426,3560.31 2726.3,3260.01 2726.3,3214.7 2743,3198 v1(2743,3171)
SCL: J2.1 R7.2 U2.15 | length 1461.8
  Top Layer, Top w8: v1(2739,3927) 2965,3927 R7.2@3003,3965 ; U2.15 2860.9,3108.9 v1(2861,3109) ; R7.2@3007,3964 3075,3964 3085,3974 3085,3997 3093,4005 J2.1
  Bottom Layer, Bottom w8: v1(2739,3927) 2669,3857 2669,3430.45 2806.3,3293.15 2806.3,3251.07 2861,3196.37 v1@2861,3110
SDA: J1.5 R6.2 U2.16 | length 1331.7
  Top Layer, Top w8: v1@2708,3848 2708,3963 2750,4005 J1.5 2817,4005 2829,3993 2829,3978 2839,3968 R6.2@2911,3968 ; U2.16 2839.44,3089.21 2848.35,3080.3 2875.3,3080.3 v1(2900,3105)
  Bottom Layer, Bottom w8: v1(2709,3845) 2685,3821 2685,3437.08 2822.3,3299.78 2822.3,3257.7 2900,3180 v1(2900,3105)
SERVO_1: R3.2 U2.46 | length 608.1
  Top Layer, Top w8: U2.46 3189.9,3108.9 3191,3107.8 v1(3191,3107) ; v1(3520,2919) 3560,2919 R3.2@3564,2923
  Bottom Layer, Bottom w8: v1(3191,3107) 3243,3107 3252,3098 3252,2957 3273,2936 3503,2936 v1(3520,2919)
SERVO_1_EXT: K1.1 R3.1 | length 380.5
  Top Layer, Top w12: R3.1 3578.4,2842.6 3620,2801 3620,2769 3651,2738 3822,2738 K1.1@3869,2785
SERVO_2: R8.2 U2.47 | length 614.5
  Top Layer, Top w8: U2.47 3169.58,3128.58 v1(3189,3148) ; v1(3515,3007) 3515.6,3007.6 R8.2
  Bottom Layer, Bottom w8: v1@3189,3146 3258,3146 3277,3127 3277,2998 3295,2980 3488,2980 v1(3515,3007)
SERVO_2_EXT: K2.3 R8.1 | length 162.3
  Top Layer, Top w12: R8.1 3605.6,3082.4 3686,3002 K2.3@3686,2989
SSEL: J1.4 U2.18 | length 1298.6
  Top Layer, Top w8: v1(2560,3904) 2651.02,3995.02 J1.4@2651.02,3999.02 ; U2.18 2872.84,3049.84 v1(2874,3051)
  Bottom Layer, Bottom w8: v1(2560,3904) 2558.98,3902.98 2525.98,3902.98 2500,3877 2500,3752.77 2486,3738.77 2486,3568.2 2774.3,3279.9 2774.3,3237.82 2802.4,3209.72 2802.4,3108.2 2845.6,3065 2860,3065 v1(2874,3051)
SWCLK: P4.2 U2.29 | length 1512.8
  Top Layer, Top w8: v1(2920,2928) 2920,2879 U2.29@2921,2879
  Bottom Layer, Bottom w8: v1(2920,2928) 2920,2926 2997,2849 3566.63,2849 3607,2889.37 3607,3038.63 3542,3103.63 3542,3443.77 3568.23,3470 P4.2@3675,3470
SWDIO: P4.3 U2.39 | length 1335
  Top Layer, Top w8: U2.39 3162.9,2971.1 v1(3185,2949)
  Bottom Layer, Bottom w8: v1(3185,2949) 3186,2948 3186,2891 3210,2867 3562,2867 3590,2895 3590,3033 3523,3100 3523,3459.63 3563.37,3500 3618,3500 P4.3@3669,3551
TXD: R17_1.2 R17_2.2 U2.12 | length 402
  Top Layer, Top w8: R17_1.2@2644,3387 2646,3385 2735,3385 2733,3387 2733,3425 v1(2734,3426) ; U2.12 2841.73,3263.73 2848,3270 v1(2849,3270)
  Bottom Layer, Bottom w8: v1(2734,3426) 2734,3410.71 2838.3,3306.41 2838.3,3280.7 v1(2849,3270)
USB_CON: Q1.1 R17_1.1 R17_2.1 U2.22 | length 794.1
  Top Layer, Top w8: Q1.1 2632.6,2885.6 2643,2896 2702,2896 2714,2908 2714,2965 2721,2972 U2.22@2781,2972 ; R17_1.1 R17_2.1 2730.6,3312.6 R17_2.1@2732,3314 ; v1(2702,3167) 2702,3199 2730,3227 R17_2.1@2730,3310 ; U2.22 2831.9,2971.1 v1(2832,2971)
  Bottom Layer, Bottom w8: v1(2702,3167) 2733,3136 2733,3070 v1(2832,2971)
USB_DM: JP1.2 R5.2 | length 726.7
  Top Layer, Top w12: 2114,2795 2119,2795 JP1.2@2119,2738
  Top Layer, Top w24: 2114,2795 2114,3051 2199,3136 2430,3136 ; 2431,3136 2449,3154 R5.2@2481,3154
USB_DM_BUF: C13.1 R5.1 R18.1 U2.19 | length 391.8
  Top Layer, Top w8: R5.1@2555,3157 2555.6,3157.6 C13.1 ; R5.1 2557.4,3224.4 R18.1@2562,3229 ; C13.1@2627,3150 2655,3150 2679,3126 2705.63,3126 2724,3107.63 2724,3044 2737.84,3030.16 U2.19
USB_DP: JP1.3 R4.2 | length 681.4
  Top Layer, Top w12: JP1.3@2147,2735 2147,2793
  Top Layer, Top w24: 2148,2794 2148,3038 2214,3104 2433,3104 2451,3086 2482.6,3086 R4.2
USB_DP_BUF: C14.1 R4.1 R19.2 U2.20 | length 372.1
  Top Layer, Top w8: R4.1 2557.4,2999.6 R19.2@2560,2997 ; R4.1@2567.6,3082.4 C14.1 ; C14.1@2651,3086 2675,3110 2699,3110 2708,3101 2708,3034.8 2732.32,3010.47 U2.20
USB_DP_PULLUP: Q1.3 R19.1 | length 101.2
  Top Layer, Top w8: R19.1@2574,2935 2666,2935 2669,2938 2669,2941.52 Q1.3
USB_ISP: R20.1 U2.14 | length 213
  Top Layer, Top w8: U2.14@2794,3128 2815,3128 2825,3138 2825,3164 2811.94,3177.06 2811.94,3300.66 R20.1@2805,3307.6
XTALIN: C11.1 U2.6 X1.1 | length 720.3
  Top Layer, Top w8: U2.6 2959.84,3247.05 ; 2960,3242 2960,3266 2967,3273 2967,3298.35 2979.65,3311 3124.8,3311 3171.8,3264 3212,3264 3234,3242 C11.1@3246,3242
  Top Layer, Top w10: C11.1@3265,3236 3402,3236 3420,3218 X1.1
XTALOUT: C12.1 U2.7 X1.2 | length 666.8
  Top Layer, Top w8: U2.7 2940.16,3249.56 2940,3249.72 2940,3270 2951,3281 2951,3304.97 2973.03,3327 3131.42,3327 3156.42,3302 C12.1@3251,3302 ; C12.1 3393.6,3307.6 3413,3327 X1.2@3413,3408
pads on no net: FM1.1 FM2.1 FM3.1 JP1.5 JP1.6 JP1.7 JP1.8 JP1.9 JP1.10 NP1.1 U2.17 U2.21 U2.23 U2.24 U2.25 U2.31 U2.40 U2.42 U2.43 U2.45 U2.48

## Polygon pours and split planes (outlines as drawn)
GND on Bottom Layer, Bottom "Mid-Layer 1, GND-No Net" (solid, remove dead copper, pour order 4): 2010,4485 3885,4485 3885,2610 2010,2610
GND on Top Layer, Top "Mid-Layer 1, GND-No Net" (solid, remove dead copper, pour order 3): 2010,4485 3885,4485 3885,2610 2010,2610

## Keep-outs
Keep-Out Layer, Board:
  lines w5: 1839.59,3543.25 1923.59,3543.25 ; 1897.59,3517.25 1923.09,3542.75 ; 1897.59,3569.25 1922.59,3544.25 ; 2926.82,2479.55 2951.82,2504.55 ; 2926.82,4598.48 2951.82,4573.48 ; 2952.82,2421.55 2952.82,2505.55 ; 2952.82,4572.48 2952.82,4656.48 ; 2953.32,2505.05 2978.82,2479.55 ; 2953.32,4572.98 2978.82,4598.48 ; 3990.52,3543.25 4074.52,3543.25 ; 3991.02,3542.75 4016.52,3517.25 ; 3991.52,3544.25 4016.52,3569.25 ; 1968.5,2559.06 3937.01,2559.06 3937.01,4527.56 1968.5,4527.56 1968.5,2559.06

## Other copper
Top Layer, Top:
  pour cut-out: 1970,4100 2120,4100 2120,3955 1970,3955
  pour cut-out: 3781,2713 3931,2713 3931,2568 3781,2568
  pour cut-out: 3781,4100 3931,4100 3931,3955 3781,3955
Bottom Layer, Bottom:
  pour cut-out: 3845,4525 3845,2880 3935,2880 3935,4525
  text "WWW.AME.NU" at 3900,4470 h40 r90
  text "Kekketek - FanBot" at 3900,4050 h40 r90
  text "Robocup 2013" at 3900,3360 h40 r90

## Silkscreen, mask and mechanical layers (free items; w line width, h text height)
Mechanical 3, TSK:
  text "D3" at 2535,4470 h36
  text "U3" at 3565,4465 h36
  text "R21_1" at 2740,4310 h36 r90
  text "R21_2" at 2300,4300 h36 r90
  text "R23" at 2855,4200 h36 r90
  text "C17" at 3100,4200 h36 r90
  text "R2_1" at 3657,4200 h36 r90
  text "R1_1" at 2053,4195 h36 r90
  text "GND" at 2150,4175 h45
  text "3V3" at 2150,4075 h45
  text "R10" at 2955,4040 h36 r90
  text "J2" at 3630,3985 h36
  text "J1" at 2205,3980 h45
  text "1" at 2335,3900 h45
  text "2" at 2435,3900 h45
  text "3" at 2535,3900 h45
  text "4" at 2635,3900 h45
  text "5" at 2735,3900 h45
  text "R6" at 2860,3900 h36 r90
  text "R7" at 3100,3900 h36 r90
  text "6" at 3135,3900 h45
  text "7" at 3235,3900 h45
  text "8" at 3335,3900 h45
  text "9" at 3435,3900 h45
  text "10" at 3535,3900 h45
  text "P4" at 3555,3757 h36
  text "GND" at 3765,3755 h36
  text "U1" at 2115,3735 h36
  text "SW1" at 2985,3690 h36
  text "RST" at 3765,3655 h36
  text "C6" at 2325,3630 h36 r90
  text "R2" at 3170,3580 h36 r90
  text "C3" at 3270,3580 h36 r90
  text "R16" at 2775,3570 h36 r90
  text "X1" at 3390,3570 h36
  text "SWDIO" at 3765,3555 h36
  text "C1" at 2326,3475 h36 r90
  text "C2" at 2564,3474 h36 r90
  text "SWCLK" at 3765,3455 h36
  text "C8" at 3585,3435 h36 r90
  text "R17_1" at 2655,3420 h36 r90
  text "3V3" at 3765,3355 h36
  text "C7" at 2985,3300 h36 r90
  text "C12" at 3210,3300 h36 r90
  text "K2" at 3855,3280 h36
  text "R20" at 2760,3240 h36
  text "R18" at 2520,3225 h36 r90
  text "GND" at 3765,3174 h36
  text "C4" at 3645,3165 h36 r90
  text "C11" at 3210,3160 h36 r90
  text "C13" at 2725,3155 h36 r90
  text "R5" at 2380,3150 h36
  text "5V" at 3765,3074 h36
  text "R4" at 2382,3056 h36
  text "R8" at 3647,3016 h36 r90
  text "C14" at 2725,3000 h36 r90
  text "C10" at 3210,3000 h36 r90
  text "SIG2" at 3765,2974 h36
  text "R19" at 2520,2925 h36 r90
  text "Q1" at 2550,2850 h36
  text "R3" at 3531,2849 h36 r90
  text "U2" at 3089,2835 h36
  text "USBG" at 2020,2825 h36
  text "R14" at 3350,2790 h36 r90
  text "GND" at 3670,2731 h36 r270
  text "5V" at 3770,2731 h36 r270
  text "SIG1" at 3870,2731 h36 r270
  text "R15" at 3518,2664 h36 r90
  text "R11" at 2535,2605 h36
  text "R12" at 2795,2605 h36
  text "R13" at 3025,2600 h36
  text "K1" at 3545,2580 h36
Mechanical 4, BSK:
  drawing of 5472 lines, arcs and shapes, not listed

## Text inside footprints (layer, text, board x,y; h text height)
J1: Top Overlay, Top Silk "1" at 2372.51,4105 h31.25 r180
J2: Top Overlay, Top Silk "1" at 3172.51,4105 h31.25 r180
J3: Top Overlay, Top Silk "1" at 2372.51,4305 h31.25 r180
J4: Top Overlay, Top Silk "1" at 3172.51,4305 h31.25 r180
J5: Top Overlay, Top Silk "1" at 2372.51,4205 h31.25 r180
J6: Top Overlay, Top Silk "1" at 3172.51,4205 h31.25 r180
JP1: Top Overlay, Top Silk "1" at 2108.19,2834.42 h31.25 r180
P4: Top Overlay, Top Silk "1" at 3590,3389.75 h31.25 r270